# Altium PCB CM5 Nas.PcbDoc (part 2 of 4)
Units mm, origin at the board's own origin, x right, y up, seen from the top; angles counter-clockwise.
Board outline 152.4 x 101.6 mm, 20 copper layers (F.Cu, F.Mask, B.Cu, B.Mask, In1.Cu, F.SilkS, In2.Cu, B.SilkS, F.Adhes, B.Adhes, F.Paste, B.Paste, Dwgs.User, Cmts.User, Eco1.User, Eco2.User, Edge.Cuts, Margin, B.CrtYd, F.CrtYd); 373 components, 619 nets, 1990 pads, 0 vias.
Unrouted connection lines stored in the file: 1086.
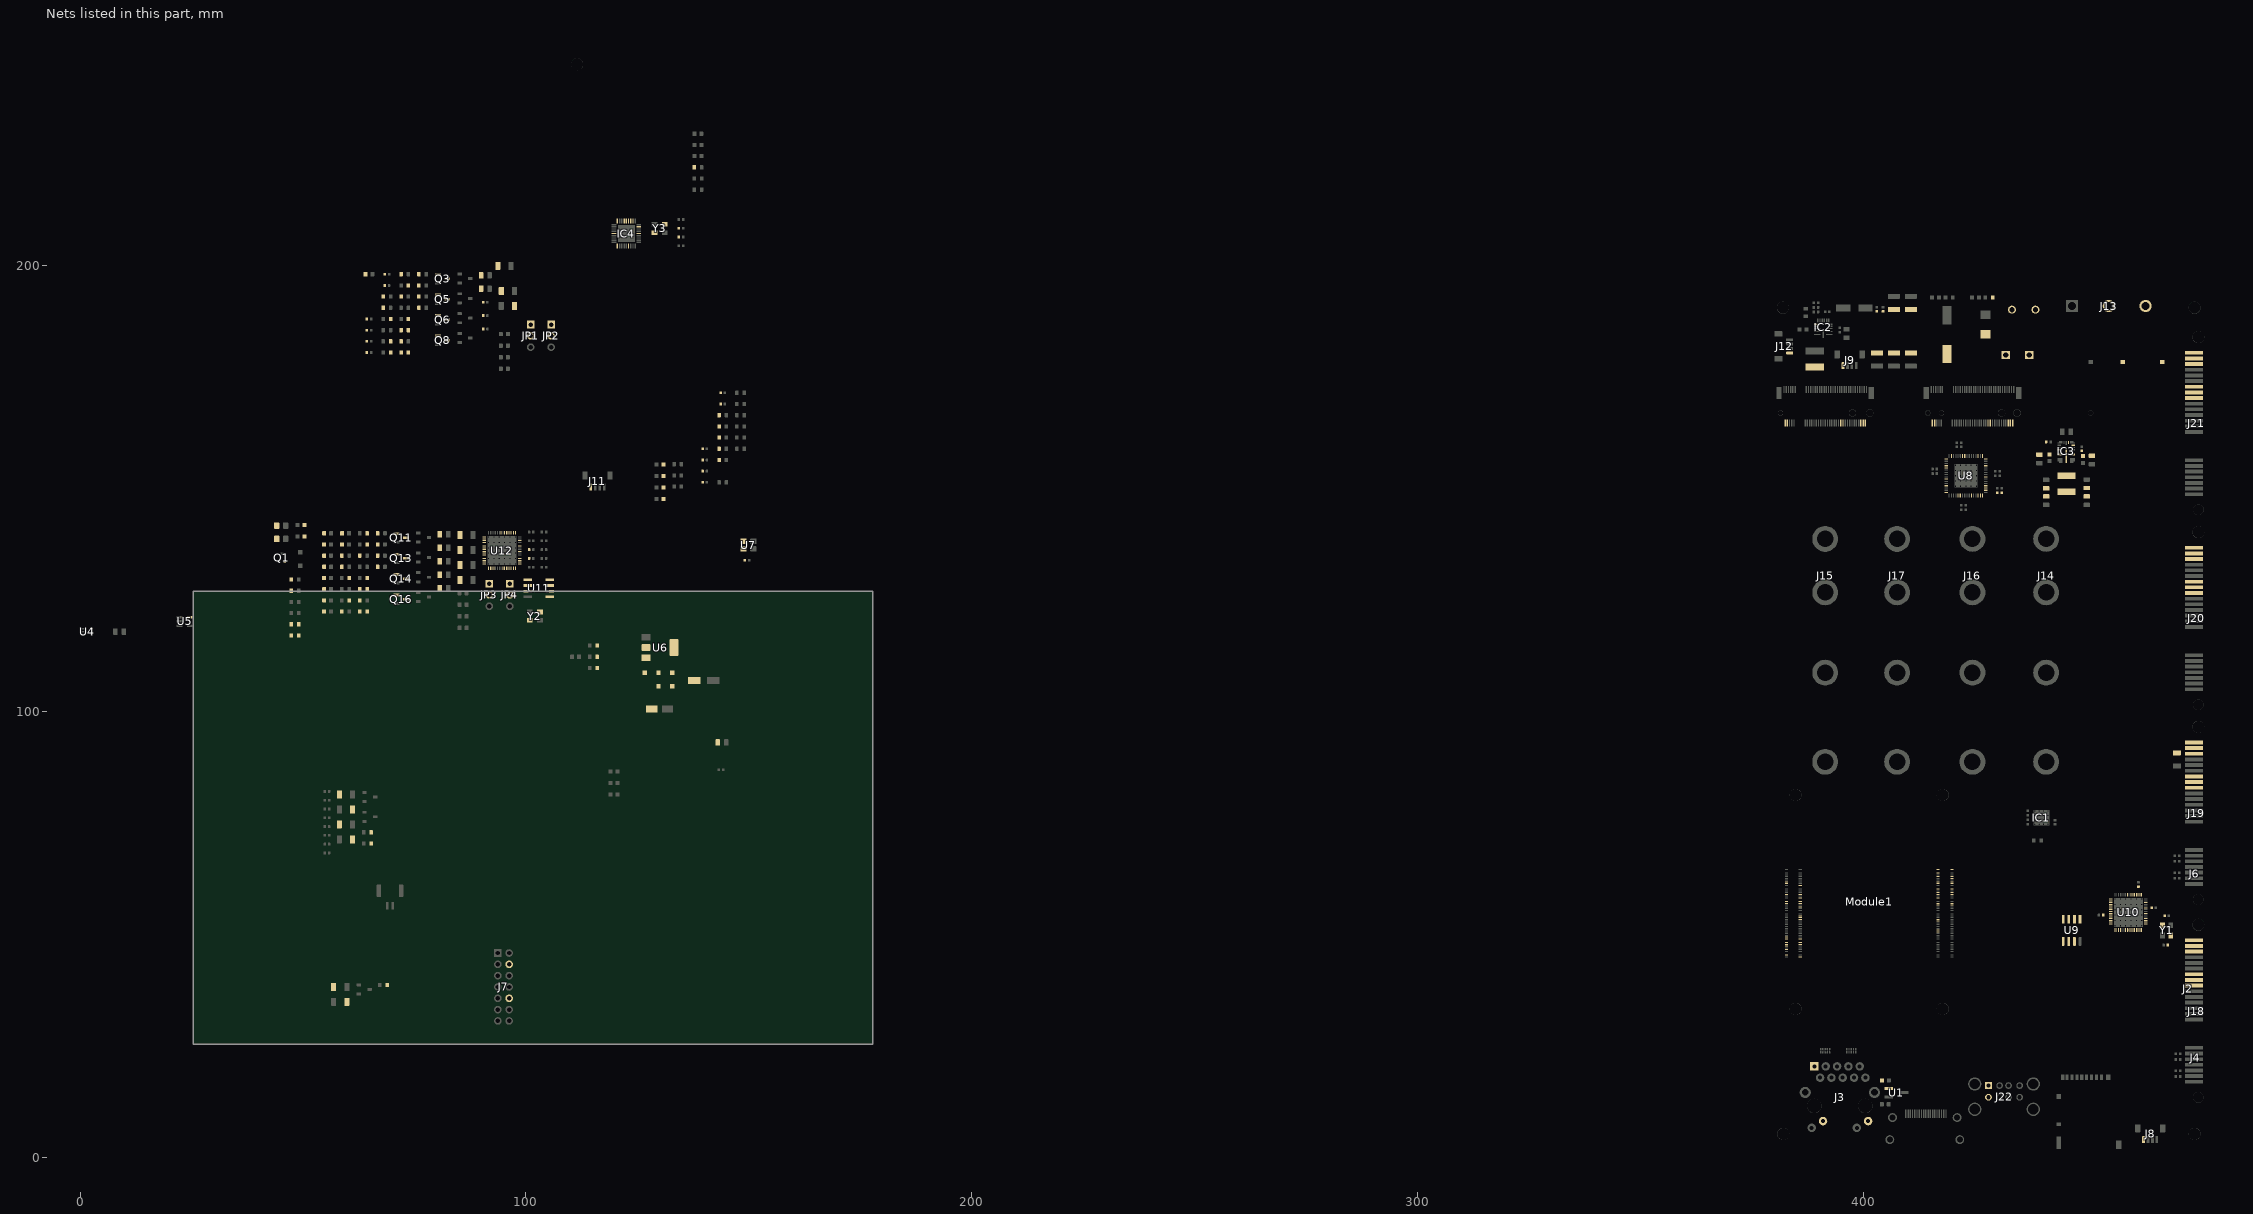
[diagram p12: the nets of this part, all layers, seen from the top]

## Footprints (in the part's own frame and the unit in brackets; to place one, negate y for a bottom-side part, rotate by r counter-clockwise, add the part's x,y. Pads: shape width x height; smd on the part's side, far side on the other; paste and mask are expansions set on the pad) (continued)
PinHeader_2x07_P2.54mm_Vertical [mm]
  rect 1.7x1.7 hole 1 paste-2539.97 mask-1.7: 1(0,0)
  round 1.7 hole 1 paste-2539.97 mask-1.7: 2(2.54,0) 3(0,-2.54) 4(2.54,-2.54) 5(0,-5.08) 6(2.54,-5.08) 7(0,-7.62) 8(2.54,-7.62) 9(0,-10.16) 10(2.54,-10.16) 11(0,-12.7) 12(2.54,-12.7) 13(0,-15.24) 14(2.54,-15.24)
  F.SilkS lines w0.254: -1.38,0 -1.38,1.38 0,1.38 ; -1.38,-16.62 3.92,-16.62 3.92,1.38 1.27,1.38 1.27,-1.27 -1.38,-1.27 -1.38,-16.62
  F.CrtYd lines w0.254: -1.77,-17.02 4.32,-17.02 4.32,1.78 -1.77,1.78 -1.77,-17.02
QFN50P600X600X100-37N-D [mm]
  rect 1.1x0.3 smd paste-1.1 mask-1.1: 1(-2.8,2) 2(-2.8,1.5) 3(-2.8,1) 4(-2.8,0.5) 5(-2.8,0) 6(-2.8,-0.5) 7(-2.8,-1) 8(-2.8,-1.5) 9(-2.8,-2) 19(2.8,-2) 20(2.8,-1.5) 21(2.8,-1) 22(2.8,-0.5) 23(2.8,0) 24(2.8,0.5) 25(2.8,1) 26(2.8,1.5) 27(2.8,2)
  rect 0.3x1.1 smd paste-1.1 mask-1.1: 10(-2,-2.8) 11(-1.5,-2.8) 12(-1,-2.8) 13(-0.5,-2.8) 14(0,-2.8) 15(0.5,-2.8) 16(1,-2.8) 17(1.5,-2.8) 18(2,-2.8) 28(2,2.8) 29(1.5,2.8) 30(1,2.8) 31(0.5,2.8) 32(0,2.8) 33(-0.5,2.8) 34(-1,2.8) 35(-1.5,2.8) 36(-2,2.8)
  rect 3.8x3.8 smd paste-3.8 mask-3.8: 37(0,0)
  F.SilkS circle w0.254: c-3.35,2.75 r0.125
  F.CrtYd lines w0.254: -3.6,-3.6 3.6,-3.6 3.6,3.6 -3.6,3.6 -3.6,-3.6
QFN-64-1EP_8x8mm_P0.4mm_EP6.5x6.5mm_ThermalVias [mm]
  rrect25% 0.8x0.2 smd paste-0.8 mask-0.8: 1(-3.95,3) 2(-3.95,2.6) 3(-3.95,2.2) 4(-3.95,1.8) 5(-3.95,1.4) 6(-3.95,1) 7(-3.95,0.6) 8(-3.95,0.2) 9(-3.95,-0.2) 10(-3.95,-0.6) 11(-3.95,-1) 12(-3.95,-1.4) 13(-3.95,-1.8) 14(-3.95,-2.2) 15(-3.95,-2.6) 16(-3.95,-3) 33(3.95,-3) 34(3.95,-2.6) 35(3.95,-2.2) 36(3.95,-1.8) 37(3.95,-1.4) 38(3.95,-1) 39(3.95,-0.6) 40(3.95,-0.2) 41(3.95,0.2) 42(3.95,0.6) 43(3.95,1) 44(3.95,1.4) 45(3.95,1.8) 46(3.95,2.2) 47(3.95,2.6) 48(3.95,3)
  rrect25% 0.2x0.8 smd paste-0.8 mask-0.8: 17(-3,-3.95) 18(-2.6,-3.95) 19(-2.2,-3.95) 20(-1.8,-3.95) 21(-1.4,-3.95) 22(-1,-3.95) 23(-0.6,-3.95) 24(-0.2,-3.95) 25(0.2,-3.95) 26(0.6,-3.95) 27(1,-3.95) 28(1.4,-3.95) 29(1.8,-3.95) 30(2.2,-3.95) 31(2.6,-3.95) 32(3,-3.95) 49(3,3.95) 50(2.6,3.95) 51(2.2,3.95) 52(1.8,3.95) 53(1.4,3.95) 54(1,3.95) 55(0.6,3.95) 56(0.2,3.95) 57(-0.2,3.95) 58(-0.6,3.95) 59(-1,3.95) 60(-1.4,3.95) 61(-1.8,3.95) 62(-2.2,3.95) 63(-2.6,3.95) 64(-3,3.95)
  round 0.5 hole 0.2 paste-2539.97 mask-0.5: 65(-3,-3) 65(-3,-1.8) 65(-3,-0.6) 65(-3,0.6) 65(-3,1.8) 65(-3,3) 65(-1.8,-3) 65(-1.8,-1.8) 65(-1.8,-0.6) 65(-1.8,0.6) 65(-1.8,1.8) 65(-1.8,3) 65(-0.6,-3) 65(-0.6,-1.8) 65(-0.6,-0.6) 65(-0.6,0.6) 65(-0.6,1.8) 65(-0.6,3) 65(0.6,-3) 65(0.6,-1.8) 65(0.6,-0.6) 65(0.6,0.6) 65(0.6,1.8) 65(0.6,3) 65(1.8,-3) 65(1.8,-1.8) 65(1.8,-0.6) 65(1.8,0.6) 65(1.8,1.8) 65(1.8,3) 65(3,-3) 65(3,-1.8) 65(3,-0.6) 65(3,0.6) 65(3,1.8) 65(3,3)
  rect 6.5x6.5 smd paste-6.5 mask-6.5: 65(0,0)
  rect 6.5x6.5 on Mid2 paste-6.5 mask-6.5: 65(0,0)
  rrect25% 1.01x1.01 on Mid13 paste-1.01 mask-1.01: Un1(-2.6,2.6) Un2(-2.6,1.3) Un3(-2.6,0) Un4(-2.6,-1.3) Un5(-2.6,-2.6) Un6(-1.3,2.6) Un7(-1.3,1.3) Un8(-1.3,0) Un9(-1.3,-1.3) Un10(-1.3,-2.6) Un11(0,2.6) Un12(0,1.3) Un13(0,0) Un14(0,-1.3) Un15(0,-2.6) Un16(1.3,2.6) Un17(1.3,1.3) Un18(1.3,0) Un19(1.3,-1.3) Un20(1.3,-2.6) Un21(2.6,2.6) Un22(2.6,1.3) Un23(2.6,0) Un24(2.6,-1.3) Un25(2.6,-2.6)
  F.SilkS region: -4.11,4.11 -4.35,4.44 -3.87,4.44
  F.SilkS lines w0.254: -4.11,-3.36 -4.11,-4.11 -3.36,-4.11 ; -4.11,3.36 -4.11,3.87 ; -3.81,4.11 -3.36,4.11 ; 3.36,-4.11 4.11,-4.11 4.11,-3.36 ; 3.36,4.11 4.11,4.11 4.11,3.36
  F.CrtYd lines w0.254: -4.6,-3.35 -4.6,3.35 -4.25,3.35 -4.25,4.25 -3.35,4.25 -3.35,4.6 3.35,4.6 3.35,4.25 4.25,4.25 4.25,3.35 4.6,3.35 4.6,-3.35 4.25,-3.35 4.25,-4.25 3.35,-4.25 3.35,-4.6 -3.35,-4.6 -3.35,-4.25 -4.25,-4.25 -4.25,-3.35 -4.6,-3.35
QFN-64-1EP_9x9mm_P0.5mm_EP5.2x5.2mm_ThermalVias [mm]
  rrect25% 0.825x0.25 smd paste-0.825 mask-0.825: 1(-4.437,3.75) 2(-4.437,3.25) 3(-4.437,2.75) 4(-4.437,2.25) 5(-4.437,1.75) 6(-4.437,1.25) 7(-4.437,0.75) 8(-4.437,0.25) 9(-4.437,-0.25) 10(-4.437,-0.75) 11(-4.437,-1.25) 12(-4.437,-1.75) 13(-4.437,-2.25) 14(-4.437,-2.75) 15(-4.437,-3.25) 16(-4.437,-3.75) 33(4.437,-3.75) 34(4.437,-3.25) 35(4.437,-2.75) 36(4.437,-2.25) 37(4.437,-1.75) 38(4.437,-1.25) 39(4.437,-0.75) 40(4.437,-0.25) 41(4.437,0.25) 42(4.437,0.75) 43(4.437,1.25) 44(4.437,1.75) 45(4.437,2.25) 46(4.437,2.75) 47(4.437,3.25) 48(4.437,3.75)
  rrect25% 0.25x0.825 smd paste-0.825 mask-0.825: 17(-3.75,-4.437) 18(-3.25,-4.437) 19(-2.75,-4.437) 20(-2.25,-4.437) 21(-1.75,-4.437) 22(-1.25,-4.437) 23(-0.75,-4.437) 24(-0.25,-4.437) 25(0.25,-4.437) 26(0.75,-4.437) 27(1.25,-4.437) 28(1.75,-4.437) 29(2.25,-4.437) 30(2.75,-4.437) 31(3.25,-4.437) 32(3.75,-4.437) 49(3.75,4.437) 50(3.25,4.437) 51(2.75,4.437) 52(2.25,4.437) 53(1.75,4.437) 54(1.25,4.437) 55(0.75,4.437) 56(0.25,4.437) 57(-0.25,4.437) 58(-0.75,4.437) 59(-1.25,4.437) 60(-1.75,4.437) 61(-2.25,4.437) 62(-2.75,4.437) 63(-3.25,4.437) 64(-3.75,4.437)
  round 0.5 hole 0.2 paste-2539.97 mask-0.5: 65(-2.35,1.175) 65(-2.35,2.35) 65(-2.35,0) 65(-2.35,-2.35) 65(-2.35,-1.175) 65(-1.175,2.35) 65(-1.175,1.175) 65(-1.175,0) 65(-1.175,-1.175) 65(-1.175,-2.35) 65(0,2.35) 65(0,1.175) 65(0,0) 65(0,-1.175) 65(0,-2.35) 65(1.175,2.35) 65(1.175,1.175) 65(1.175,0) 65(1.175,-1.175) 65(1.175,-2.35) 65(2.35,1.175) 65(2.35,2.35) 65(2.35,0) 65(2.35,-2.35) 65(2.35,-1.175)
  rect 5.2x5.2 smd paste-5.2 mask-5.2: 65(0,0)
  rect 5.2x5.2 on Mid2 paste-5.2 mask-5.2: 65(0,0)
  rrect25% 1.01x1.01 on Mid13 paste-1.01 mask-1.01: Un1(-1.95,1.95) Un2(-1.95,0.65) Un3(-1.95,-0.65) Un4(-1.95,-1.95) Un5(-0.65,1.95) Un6(-0.65,0.65) Un7(-0.65,-0.65) Un8(-0.65,-1.95) Un9(0.65,1.95) Un10(0.65,0.65) Un11(0.65,-0.65) Un12(0.65,-1.95) Un13(1.95,1.95) Un14(1.95,0.65) Un15(1.95,-0.65) Un16(1.95,-1.95)
  F.SilkS region: -4.61,4.61 -4.85,4.94 -4.37,4.94
  F.SilkS lines w0.254: 4.135,-4.61 4.61,-4.61 4.61,-4.135 ; -4.135,-4.61 -4.61,-4.61 -4.61,-4.135 ; 4.61,4.135 4.61,4.61 4.135,4.61 ; -4.61,4.135 -4.61,4.37 ; -4.135,4.61 -4.31,4.61
  F.CrtYd lines w0.254: 4.13,-5.1 -4.13,-5.1 -4.13,-4.75 -4.75,-4.75 -4.75,-4.13 -5.1,-4.13 -5.1,4.13 -4.75,4.13 -4.75,4.75 -4.13,4.75 -4.13,5.1 4.13,5.1 4.13,4.75 4.75,4.75 4.75,4.13 5.1,4.13 5.1,-4.13 4.75,-4.13 4.75,-4.75 4.13,-4.75 4.13,-5.1
R_0402_1005Metric#1 [mm]
  rrect25% 0.54x0.64 on Mid2 paste-0.64 mask-0.64: 1(-0.51,0) 2(0.51,0)
  B.SilkS lines w0.254: -0.154,0.38 0.154,0.38 ; -0.154,-0.38 0.154,-0.38
  B.CrtYd lines w0.254: -0.93,0.47 -0.93,-0.47 0.93,-0.47 0.93,0.47 -0.93,0.47
R_0402_1005Metric#2 [mm]
  rrect25% 0.54x0.64 smd paste-0.64 mask-0.64: 1(-0.51,0) 2(0.51,0)
  F.SilkS lines w0.254: 0.154,0.38 -0.154,0.38 ; 0.154,-0.38 -0.154,-0.38
  F.CrtYd lines w0.254: 0.93,0.47 -0.93,0.47 -0.93,-0.47 0.93,-0.47 0.93,0.47
R_0603_1608Metric#1 [mm]
  rrect25% 0.8x0.95 smd paste-0.95 mask-0.95: 1(-0.825,0) 2(0.825,0)
  F.SilkS lines w0.254: -0.237,-0.523 0.237,-0.523 ; -0.237,0.523 0.237,0.523
  F.CrtYd lines w0.254: -1.48,-0.73 1.48,-0.73 1.48,0.73 -1.48,0.73 -1.48,-0.73
R_0603_1608Metric#2 [mm]
  rrect25% 0.8x0.95 on Mid2 paste-0.95 mask-0.95: 1(-0.825,0) 2(0.825,0)
  B.SilkS lines w0.254: -0.237,-0.523 0.237,-0.523 ; -0.237,0.523 0.237,0.523
  B.CrtYd lines w0.254: -1.48,-0.73 1.48,-0.73 1.48,0.73 -1.48,0.73 -1.48,-0.73
R_0805_2012Metric_Pad1.20x1.40mm_HandSolder [mm]
  rrect21% 1.2x1.4 smd paste-1.4 mask-1.4: 1(-1,0) 2(1,0)
  F.SilkS lines w0.254: -0.227,-0.735 0.227,-0.735 ; -0.227,0.735 0.227,0.735
  F.CrtYd lines w0.254: -1.85,-0.95 1.85,-0.95 1.85,0.95 -1.85,0.95 -1.85,-0.95
Raspberry-Pi-5-Compute-Module [mm]
  rect 0.7x0.2 smd paste-0.7 mask-0.7: 1(-2.04,31.3) 2(1.04,31.3) 3(-2.04,30.9) 4(1.04,30.9) 5(-2.04,30.5) 6(1.04,30.5) 7(-2.04,30.1) 8(1.04,30.1) 9(-2.04,29.7) 10(1.04,29.7) 11(-2.04,29.3) 12(1.04,29.3) 13(-2.04,28.9) 14(1.04,28.9) 15(-2.04,28.5) 16(1.04,28.5) 17(-2.04,28.1) 18(1.04,28.1) 19(-2.04,27.7) 20(1.04,27.7) 21(-2.04,27.3) 22(1.04,27.3) 23(-2.04,26.9) 24(1.04,26.9) 25(-2.04,26.5) 26(1.04,26.5) 27(-2.04,26.1) 28(1.04,26.1) 29(-2.04,25.7) 30(1.04,25.7) 31(-2.04,25.3) 32(1.04,25.3) 33(-2.04,24.9) 34(1.04,24.9) 35(-2.04,24.5) 36(1.04,24.5) 37(-2.04,24.1) 38(1.04,24.1) 39(-2.04,23.7) 40(1.04,23.7) 41(-2.04,23.3) 42(1.04,23.3) 43(-2.04,22.9) 44(1.04,22.9) 45(-2.04,22.5) 46(1.04,22.5) 47(-2.04,22.1) 48(1.04,22.1) 49(-2.04,21.7) 50(1.04,21.7) 51(-2.04,21.3) 52(1.04,21.3) 53(-2.04,20.9) 54(1.04,20.9) 55(-2.04,20.5) 56(1.04,20.5) 57(-2.04,20.1) 58(1.04,20.1) 59(-2.04,19.7) 60(1.04,19.7) 61(-2.04,19.3) 62(1.04,19.3) 63(-2.04,18.9) 64(1.04,18.9) 65(-2.04,18.5) 66(1.04,18.5) 67(-2.04,18.1) 68(1.04,18.1) 69(-2.04,17.7) 70(1.04,17.7) 71(-2.04,17.3) 72(1.04,17.3) 73(-2.04,16.9) 74(1.04,16.9) 75(-2.04,16.5) 76(1.04,16.5) 77(-2.04,16.1) 78(1.04,16.1) 79(-2.04,15.7) 80(1.04,15.7) 81(-2.04,15.3) 82(1.04,15.3) 83(-2.04,14.9) 84(1.04,14.9) 85(-2.04,14.5) 86(1.04,14.5) 87(-2.04,14.1) 88(1.04,14.1) 89(-2.04,13.7) 90(1.04,13.7) 91(-2.04,13.3) 92(1.04,13.3) 93(-2.04,12.9) 94(1.04,12.9) 95(-2.04,12.5) 96(1.04,12.5) 97(-2.04,12.1) 98(1.04,12.1) 99(-2.04,11.7) 100(1.04,11.7) 101(31.96,31.3) 102(35.04,31.3) 103(31.96,30.9) 104(35.04,30.9) 105(31.96,30.5) 106(35.04,30.5) 107(31.96,30.1) 108(35.04,30.1) 109(31.96,29.7) 110(35.04,29.7) 111(31.96,29.3) 112(35.04,29.3) 113(31.96,28.9) 114(35.04,28.9) 115(31.96,28.5) 116(35.04,28.5) 117(31.96,28.1) 118(35.04,28.1) 119(31.96,27.7) 120(35.04,27.7) 121(31.96,27.3) 122(35.04,27.3) 123(31.96,26.9) 124(35.04,26.9) 125(31.96,26.5) 126(35.04,26.5) 127(31.96,26.1) 128(35.04,26.1) 129(31.96,25.7) 130(35.04,25.7) 131(31.96,25.3) 132(35.04,25.3) 133(31.96,24.9) 134(35.04,24.9) 135(31.96,24.5) 136(35.04,24.5) 137(31.96,24.1) 138(35.04,24.1) 139(31.96,23.7) 140(35.04,23.7) 141(31.96,23.3) 142(35.04,23.3) 143(31.96,22.9) 144(35.04,22.9) 145(31.96,22.5) 146(35.04,22.5) 147(31.96,22.1) 148(35.04,22.1) 149(31.96,21.7) 150(35.04,21.7) 151(31.96,21.3) 152(35.04,21.3) 153(31.96,20.9) 154(35.04,20.9) 155(31.96,20.5) 156(35.04,20.5) 157(31.96,20.1) 158(35.04,20.1) 159(31.96,19.7) 160(35.04,19.7) 161(31.96,19.3) 162(35.04,19.3) 163(31.96,18.9) 164(35.04,18.9) 165(31.96,18.5) 166(35.04,18.5) 167(31.96,18.1) 168(35.04,18.1) 169(31.96,17.7) 170(35.04,17.7) 171(31.96,17.3) 172(35.04,17.3) 173(31.96,16.9) 174(35.04,16.9) 175(31.96,16.5) 176(35.04,16.5) 177(31.96,16.1) 178(35.04,16.1) 179(31.96,15.7) 180(35.04,15.7) 181(31.96,15.3) 182(35.04,15.3) 183(31.96,14.9) 184(35.04,14.9) 185(31.96,14.5) 186(35.04,14.5) 187(31.96,14.1) 188(35.04,14.1) 189(31.96,13.7) 190(35.04,13.7) 191(31.96,13.3) 192(35.04,13.3) 193(31.96,12.9) 194(35.04,12.9) 195(31.96,12.5) 196(35.04,12.5) 197(31.96,12.1) 198(35.04,12.1) 199(31.96,11.7) 200(35.04,11.7)
  round 2.7 hole 2.7 paste-2539.97 mask-2.7: Un1(0,48) Un2(0,0) Un3(33,48) Un4(33,0)
  F.SilkS lines w0.254: -1.86,11.1 -1.86,10.1 0.94,10.1 0.94,11.1 ; -1.86,31.9 -1.86,32.9 0.94,32.9 0.94,31.9 ; 32.06,11.1 32.06,10.1 34.94,10.1 34.94,11.1 ; 32.06,31.9 32.06,32.9 34.94,32.9 34.94,31.9 ; -3.5,0 ccw(c0,0) 0,-3.5 33,-3.5 ccw(c33,0) 36.5,0 36.5,48 ccw(c33,48) 33,51.5 0,51.5 ccw(c0,48) -3.5,48 -3.5,0
  F.CrtYd lines w0.254: -2.31,10.1 1.39,10.1 1.39,32.9 -2.31,32.9 -2.31,10.1 ; 31.61,10.1 35.39,10.1 35.39,32.9 31.61,32.9 31.61,10.1
RGEF1200 [mm]
  rect 1.8x1.8 hole 1.2 paste-2539.97 mask-1.8: 1(0,0)
  round 1.8 hole 1.2 paste-2539.97 mask-1.8: 2(10.15,-1.4)
  F.SilkS lines w0.254: -1.325,0.75 -3.125,0.75 -3.125,-2.1 8.875,-2.15 ; 1.275,0.75 13.275,0.75 13.275,-2.15 11.275,-2.15 ; 0,1.4 ccw(c0,1.35) 0,1.3 ccw(c0,1.35) 0,1.4
  F.CrtYd lines w0.254: -4.125,1.9 -4.125,-3.3 14.275,-3.3 14.275,1.9 -4.125,1.9
RJ45_UDE_RB1-125B8G1A [mm]
  round 1.9 hole 0.9 paste-2539.97 mask-1.9: L1(12.04,-12.27) L2(9.5,-13.79) L3(1.93,-12.27) L4(-0.61,-13.79) R2(1.27,-2.54) R3(2.54,0) R4(3.81,-2.54) R5(5.08,0) R6(6.35,-2.54) R7(7.62,0) R8(8.89,-2.54) R9(10.16,0) R10(11.43,-2.54)
  rect 1.9x1.9 hole 0.9 paste-2539.97 mask-1.9: R1(0,0)
  round 2.5 hole 1.5 paste-2539.97 mask-2.5: SH(-2.06,-5.84) SH(13.49,-5.84)
  round 3.25 hole 3.25 paste-2539.97 mask-3.25: Un1(0,-8.89) Un2(11.43,-8.89)
  F.SilkS lines w0.254: -2.36,-7.58 -2.36,-19.98 13.79,-19.98 13.79,-7.58 ; -2.36,-4.08 -2.36,2.2 13.79,2.2 13.79,-4.08
  Dwgs.User lines w0.254: -2.16,-18.78 0.84,-15.78 ; -2.16,-17.78 -0.16,-15.78 ; -2.16,-16.78 -1.16,-15.78 ; -1.16,-19.78 2.84,-15.78 ; -0.6,-8.09 0.6,-6.89 ; -0.6,-7.09 0.6,-5.89 ; -0.6,-6.09 0.6,-4.89 ; -0.6,-5.09 0.6,-3.89 ; -0.6,-4.09 -0.2,-3.69 ; -0.16,-19.78 3.84,-15.78 ; 0.6,-7.89 -0.6,-9.09 ; 0.84,-19.77 6.33,-14.28 ; 1.84,-19.78 7.22,-14.4 ; 1.84,-15.78 -2.16,-19.78 ; 2.84,-19.77 7.22,-15.39 ; 3.84,-19.78 7.84,-15.78 ; 4.21,-15.41 5.34,-14.29 ; 4.84,-19.78 8.84,-15.78 ; 5.84,-19.78 9.84,-15.78 ; 6.84,-19.78 10.84,-15.78 ; 7.84,-19.78 11.84,-15.78 ; 8.84,-19.78 12.84,-15.78 ; 9.84,-19.78 13.59,-16.03 ; 10.83,-8.09 12.03,-6.89 ; 10.83,-7.09 12.03,-5.89 ; 10.83,-6.09 12.03,-4.89 ; 10.83,-5.09 12.03,-3.89 ; 10.83,-4.09 11.23,-3.69 ; 10.84,-19.77 13.59,-17.02 ; 11.84,-19.77 13.59,-18.02 ; 12.03,-7.89 10.83,-9.09 ; 12.84,-19.77 13.59,-19.02 ; -2.16,-19.78 13.59,-19.78 13.59,-15.78 7.22,-15.78 7.22,-14.28 4.21,-14.28 4.21,-15.78 -2.16,-15.78 -2.16,-19.78 ; -0.6,-9.09 -0.6,-3.69 0.6,-3.69 0.6,-9.09 -0.6,-9.09 ; 10.83,-9.09 10.83,-3.69 12.03,-3.69 12.03,-9.09 10.83,-9.09
  F.CrtYd lines w0.254: -3.81,-7.59 -3.81,-4.09 -2.66,-4.09 -2.66,2.5 14.09,2.5 14.09,-4.09 15.24,-4.09 15.24,-7.59 14.09,-7.59 14.09,-20.28 -2.66,-20.28 -2.66,-7.59 -3.81,-7.59
SMBJ5.0A [mil]
  rect 77x89 smd paste-89 mask-89: 1(-85.5,0) 2(85.5,0)
  F.SilkS lines w10: 95.5,-57.6 95.5,-83 -95.5,-83 -95.5,-57.6 ; 95.5,57.6 95.5,83 -95.5,83 -95.5,57.6
  F.CrtYd lines w10: 134,-88 134,88 -134,88 -134,-88 134,-88
SMBJ12A [mil]
  rect 77x89 on Mid2 paste-89 mask-89: 1(-85.5,0) 2(85.5,0)
  B.SilkS lines w10: 95.5,-57.6 95.5,-83 -95.5,-83 -95.5,-57.6 ; 95.5,57.6 95.5,83 -95.5,83 -95.5,57.6
  B.CrtYd lines w10: 134,-88 134,88 -134,88 -134,-88 134,-88
SOIC-8_3.9x4.9mm_P1.27mm [mm]
  rrect25% 1.95x0.6 smd paste-1.95 mask-1.95: 1(-2.475,1.905) 2(-2.475,0.635) 3(-2.475,-0.635) 4(-2.475,-1.905) 5(2.475,-1.905) 6(2.475,-0.635) 7(2.475,0.635) 8(2.475,1.905)
  F.SilkS region: -2.7,2.465 -2.94,2.795 -2.46,2.795
  F.SilkS lines w0.254: -1.95,2.56 0,2.56 1.95,2.56 ; -1.95,-2.56 0,-2.56 1.95,-2.56
  F.CrtYd lines w0.254: -2.2,2.7 2.2,2.7 2.2,2.46 3.7,2.46 3.7,-2.46 2.2,-2.46 2.2,-2.7 -2.2,-2.7 -2.2,-2.46 -3.7,-2.46 -3.7,2.46 -2.2,2.46 -2.2,2.7
SOT95P237X117-3N [mm]
  rect 1.3x0.6 smd paste-1.3 mask-1.3: 1(-1.05,0.95) 2(-1.05,-0.95) 3(1.05,0)
  F.SilkS lines w0.254: -1.7,1.5 -0.4,1.5 ; -0.05,-1.46 0.05,-1.46 0.05,1.46 -0.05,1.46 -0.05,-1.46
  F.CrtYd lines w0.254: -1.95,-1.77 1.95,-1.77 1.95,1.77 -1.95,1.77 -1.95,-1.77
SOT-23-5 [mm]
  rrect25% 1.325x0.6 smd paste-1.325 mask-1.325: 1(-1.138,0.95) 2(-1.138,0) 3(-1.138,-0.95) 4(1.138,-0.95) 5(1.138,0.95)
  F.SilkS region: -1.3,1.51 -1.54,1.84 -1.06,1.84
  F.SilkS lines w0.254: -0.8,-1.56 0,-1.56 0.8,-1.56 ; -0.8,1.56 0,1.56 0.8,1.56
  F.CrtYd lines w0.254: -2.05,-1.5 -2.05,1.5 -1.05,1.5 -1.05,1.7 1.05,1.7 1.05,1.5 2.05,1.5 2.05,-1.5 1.05,-1.5 1.05,-1.7 -1.05,-1.7 -1.05,-1.5 -2.05,-1.5
SOT-223-3_TabPin2 [mm]
  rrect25% 2x1.5 smd paste-2 mask-2: 1(-3.15,2.3) 2(-3.15,0) 3(-3.15,-2.3)
  rrect25% 2x3.8 smd paste-3.8 mask-3.8: 2(3.15,0)
  F.SilkS region: -3.13,3.31 -3.37,3.64 -2.89,3.64
  F.SilkS lines w0.254: -1.85,-3.41 1.91,-3.41 1.91,-2.15 ; -1.85,3.41 1.91,3.41 1.91,2.15
  F.CrtYd lines w0.254: -4.4,-3.6 4.4,-3.6 4.4,3.6 -4.4,3.6 -4.4,-3.6
SOT-353_SC-70-5 [mm]
  rrect25% 0.65x0.4 smd paste-0.65 mask-0.65: 1(-0.95,0.65) 2(-0.95,0) 3(-0.95,-0.65) 4(0.95,-0.65) 5(0.95,0.65)
  F.SilkS region: -1.08,1.11 -1.32,1.44 -0.84,1.44
  F.SilkS lines w0.254: -0.71,1.16 0.7,1.16 ; -0.7,-1.16 0.7,-1.16
  F.CrtYd lines w0.254: -1.6,-1.4 1.6,-1.4 1.6,1.4 -1.6,1.4 -1.6,-1.4
SPARKFUN_PRT-14417 [mm]
  rect 0.6x1.55 on Mid2 paste-1.55 mask-1.55: 1(-1.5,-2.45) 2(-0.5,-2.45) 3(0.5,-2.45) 4(1.5,-2.45)
  rect 1.2x1.8 on Mid2 paste-1.8 mask-1.8: S1(-2.8,1.425) S2(2.8,1.425)
  B.SilkS circle w0.254: c-1.5,-3.75 r0.1
  B.SilkS lines w0.254: 2.12,-2.125 3,-2.125 3,0.205 ; -2.12,-2.125 -3,-2.125 -3,0.205 ; 1.88,2.125 -1.88,2.125
  B.CrtYd lines w0.254: 3.65,-3.475 3.65,2.575 -3.65,2.575 -3.65,-3.475 3.65,-3.475
SRN5040TA1R0M [mm]
  rect 1.5x4.2 smd paste-4.2 mask-4.2: 1(-1.8,0) 2(1.8,0)
  F.SilkS lines w0.254: 1.5,-2.5 -2,-2.475 ; 1.5,2.5 -2,2.5
  F.CrtYd lines w0.254: 3.55,-3.5 3.55,3.5 -3.55,3.5 -3.55,-3.5 3.55,-3.5
SRN50402R2Y [mm]
  rect 1.5x4 smd paste-4 mask-4: 1(-1.8,0) 2(1.8,0)
  F.SilkS lines w0.254: 2.5,-2.5 -2.1,-2.5 ; 2.4,2.5 -2.1,2.5
  F.CrtYd lines w0.254: 3.55,-3.5 3.55,3.5 -3.55,3.5 -3.55,-3.5 3.55,-3.5
TestPoint_Pad_1.0x1.0mm [mm]
  rect 1x1 smd paste-1 mask-1: 1(0,0)
  F.SilkS lines w0.254: -0.7,-0.7 0.7,-0.7 0.7,0.7 -0.7,0.7 -0.7,-0.7
  F.CrtYd lines w0.254: -1,-1 1,-1 1,1 -1,1 -1,-1
TSOT-23_HandSoldering [mm]
  rrect25% 2x0.65 smd paste-2 mask-2: 1(-1.71,0.95) 2(-1.71,-0.95) 3(1.71,0)
  F.SilkS region: -1.28,1.55 -1.52,1.88 -1.04,1.88
  F.SilkS lines w0.254: -0.905,-1.56 0.945,-1.56 0.945,-0.67 ; -0.89,1.56 0.96,1.56 0.96,0.67
  F.CrtYd lines w0.254: -2.96,-1.7 2.96,-1.7 2.96,1.7 -2.96,1.7 -2.96,-1.7
USB_A_Wuerth_61400826021_Horizontal_Stacked [mm]
  rect 1.5x1.5 hole 0.92 paste-2539.97 mask-1.5: 1(0,0)
  round 1.5 hole 0.92 paste-2539.97 mask-1.5: 2(2.5,0) 3(4.5,0) 4(7,0) 5(0,-2.62) 6(2.5,-2.62) 7(4.5,-2.62) 8(7,-2.62)
  round 3 hole 2.3 paste-2539.97 mask-3: 9(-3.07,-5.33) 9(-3.07,0.35) 9(10.07,-5.33) 9(10.07,0.35)
  F.SilkS lines w0.254: -2.81,-7.08 -2.81,-15.05 -3.81,-15.05 -3.81,-15.67 10.81,-15.67 10.81,-15.05 9.81,-15.05 9.81,-7.08 ; -2.81,-3.58 -2.81,-1.4 ; -1.69,1.45 8.69,1.45 ; -0.4,1.6 0.4,1.6 ; 9.81,-3.58 9.81,-1.4
  F.CrtYd lines w0.254: -5.07,-6.17 -5.07,-4.49 -3.91,-3.33 -3.26,-3.33 -3.26,-1.74 -3.82,-1.74 -5.07,-0.49 -5.07,1.19 -3.91,2.35 -2.26,2.35 -1.8,1.89 8.8,1.89 9.26,2.35 10.91,2.35 12.07,1.19 12.07,-0.49 10.82,-1.74 10.26,-1.74 10.26,-3.33 10.91,-3.33 12.07,-4.49 12.07,-6.17 10.91,-7.33 10.26,-7.33 10.26,-14.61 11.25,-14.61 11.25,-16.11 -4.25,-16.11 -4.25,-14.61 -3.26,-14.61 -3.26,-7.33 -3.91,-7.33 -5.07,-6.17
USON-10_2.5x1.0mm_P0.5mm [mm]
  rrect25% 0.55x0.3 smd paste-0.55 mask-0.55: 1(-0.385,1) 2(-0.385,0.5) 3(-0.385,0) 4(-0.385,-0.5) 5(-0.385,-1) 6(0.385,-1) 7(0.385,-0.5) 8(0.385,0) 9(0.385,0.5) 10(0.385,1)
  F.SilkS region: -0.62,1.41 -0.9,1.41 -0.62,1.69
  F.SilkS lines w0.254: 0.5,-1.41 -0.5,-1.41 ; 0.5,1.41 -0.29,1.41
  F.CrtYd lines w0.254: 0.91,-1.5 0.91,1.5 -0.91,1.5 -0.91,-1.5 0.91,-1.5
VQFN-40-1EP_6x6mm_P0.5mm_EP3.5x3.5mm_ThermalVias [mm]
  rrect25% 0.85x0.25 on Mid2 paste-0.85 mask-0.85: 1(-2.95,-2.25) 2(-2.95,-1.75) 3(-2.95,-1.25) 4(-2.95,-0.75) 5(-2.95,-0.25) 6(-2.95,0.25) 7(-2.95,0.75) 8(-2.95,1.25) 9(-2.95,1.75) 10(-2.95,2.25) 21(2.95,2.25) 22(2.95,1.75) 23(2.95,1.25) 24(2.95,0.75) 25(2.95,0.25) 26(2.95,-0.25) 27(2.95,-0.75) 28(2.95,-1.25) 29(2.95,-1.75) 30(2.95,-2.25)
  rrect25% 0.25x0.85 on Mid2 paste-0.85 mask-0.85: 11(-2.25,2.95) 12(-1.75,2.95) 13(-1.25,2.95) 14(-0.75,2.95) 15(-0.25,2.95) 16(0.25,2.95) 17(0.75,2.95) 18(1.25,2.95) 19(1.75,2.95) 20(2.25,2.95) 31(2.25,-2.95) 32(1.75,-2.95) 33(1.25,-2.95) 34(0.75,-2.95) 35(0.25,-2.95) 36(-0.25,-2.95) 37(-0.75,-2.95) 38(-1.25,-2.95) 39(-1.75,-2.95) 40(-2.25,-2.95)
  round 0.5 hole 0.2 paste-2539.97 mask-0.5: 41(-1.5,1.5) 41(-1.5,-0.5) 41(-1.5,0.5) 41(-1.5,-1.5) 41(-0.5,1.5) 41(-0.5,-0.5) 41(-0.5,0.5) 41(-0.5,-1.5) 41(0.5,1.5) 41(0.5,-0.5) 41(0.5,0.5) 41(0.5,-1.5) 41(1.5,1.5) 41(1.5,-0.5) 41(1.5,0.5) 41(1.5,-1.5)
  rect 3.5x3.5 smd paste-3.5 mask-3.5: 41(0,0)
  rect 3.5x3.5 on Mid2 paste-3.5 mask-3.5: 41(0,0)
  rrect25% 0.94x0.94 on Mid15 paste-0.94 mask-0.94: Un1(-1.17,1.17) Un2(-1.17,0) Un3(-1.17,-1.17) Un4(0,1.17) Un5(0,0) Un6(0,-1.17) Un7(1.17,1.17) Un8(1.17,0) Un9(1.17,-1.17)
  B.SilkS region: -2.87,-3.44 -3.35,-3.44 -3.11,-3.11
  B.SilkS lines w0.254: -2.635,3.11 -3.11,3.11 -3.11,2.635 ; 2.635,3.11 3.11,3.11 3.11,2.635 ; -3.11,-2.635 -3.11,-2.87 ; 3.11,-2.635 3.11,-3.11 2.635,-3.11 ; -2.81,-3.11 -2.635,-3.11
  B.CrtYd lines w0.254: -2.63,3.63 -2.63,3.25 -3.25,3.25 -3.25,2.63 -3.63,2.63 -3.63,-2.63 -3.25,-2.63 -3.25,-3.25 -2.63,-3.25 -2.63,-3.63 2.63,-3.63 2.63,-3.25 3.25,-3.25 3.25,-2.63 3.63,-2.63 3.63,2.63 3.25,2.63 3.25,3.25 2.63,3.25 2.63,3.63 -2.63,3.63

## Part data
+5V1 +12V1 GND1 TP1 TP2 TP3 TP4 TP5 TP6 TP7: library part TestPoint_Pad_1.0x1.0mm, "SMD rectangular pad as test Point, square 1.0mm side length", ki_fp_filters="Pin* Test*"
  +5V1 +12V1 GND1 TP3 TP4 TP5 TP6 TP7: Description="test point"
  TP1 TP2: Field4=nf, Field5=nf, Field6=nf, Field7=nf, Part Description="Test point"
BT1: library part BatteryHolder_Keystone_3034_1x20mm, "Keystone 3034 SMD battery holder for 2020, 2025 and 2032 coincell batteries. http://www.keyelco.com/product-pdf.cfm?p=798", Datasheet=https://www.keyelco.com/userAssets/file/M65p9.pdf, Field4=Digikey, Field5=36-3034-ND, Field6=3034, Field7=Keystone, Part Description="Battery Retainer Coin, 20.0mm 1 Cell SMD (SMT) Tab"
C1 C2 C23 C29 C42 C54 C78 C80 C107 C135 C137 C138 C139 C140 C145 C146 C149 C150 C152 C154 C157 C158: library part C_0603_1608Metric, "Capacitor SMD 0603 (1608 Metric), square (rectangular) end terminal, IPC-7351 nominal, (Body size source: IPC-SM-782 page 76, https://www.pcb-3d.com/wordpress/wp-content/uploads/ipc-sm-782a_amendment_1_and_2.pdf), generated with kicad-footprint-generator", ki_fp_filters=C_*
  C1 C2: Datasheet=https://search.murata.co.jp/Ceramy/image/img/A01X/G101/ENG/GRM155R71C104KA88-01.pdf, Field4=Farnell, Field5=2611911, Field6="RM EMK105 B7104KV-F", Field7="TAIYO YUDEN EUROPE GMBH", Part Description="0.1uF 10% 16V Ceramic Capacitor X7R 0402 (1005 Metric)", Field8=110091611
  C23 C29 C42 C54 C78 C80 C107 C135 C137 C138 C139 C140 C145 C146 C149 C150 C152 C154 C157 C158: Description="Unpolarized capacitor, small symbol"
C3 C20 C21 C27 C28 C45 C48 C77 C81 C90 C91 C92 C93 C94 C99 C104 C128 C133 C147 C148 C151: library part C_0805_2012Metric, "Capacitor SMD 0805 (2012 Metric), square (rectangular) end terminal, IPC-7351 nominal, (Body size source: IPC-SM-782 page 76, https://www.pcb-3d.com/wordpress/wp-content/uploads/ipc-sm-782a_amendment_1_and_2.pdf, https://docs.google.com/spreadsheets/d/1BsfQQcO9C6DZCsRaXUlFlo91Tg2WpOkGARC1WS5S8t0/edit?usp=sharing), generated with kicad-footprint-generator", ki_fp_filters=C_*
  C3: Datasheet=https://search.murata.co.jp/Ceramy/image/img/A01X/G101/ENG/GRM21BR71A106KA73-01.pdf, Field5=490-14381-1-ND, Field4=Digikey, Field6=GRM21BR71A106KA73L, Field7=Murata, Part Description="10uF 10% 10V Ceramic Capacitor X7R 0805 (2012 Metric)", Field8=111893011
  C20 C21 C27 C28 C45 C48 C77 C81 C90 C91 C92 C93 C94 C99 C104 C128 C133 C147 C148 C151: Description="Unpolarized capacitor, small symbol"
C4 C6 C7 C8 C9 C12 C14 C15 C16 C17: library part C_1210_3225Metric, "Capacitor SMD 1210 (3225 Metric), square (rectangular) end terminal, IPC-7351 nominal, (Body size source: IPC-SM-782 page 76, https://www.pcb-3d.com/wordpress/wp-content/uploads/ipc-sm-782a_amendment_1_and_2.pdf), generated with kicad-footprint-generator", Description="Unpolarized capacitor", ki_fp_filters=C_*
C5 C13: library part EEE0JA152UAP, "SMD_Lytic_G", Description="Polarized capacitor", ki_fp_filters=CP_*
C10 C11 C18 C19 C22 C26 C30 C31 C33 C35 C36 C38 C39 C40 C41 C44 C46 C47 C49 C50 C51 C52 C53 C55 C56 C57 C58 C59 C60 C61 C62 C63 C64 C65 C66 C67 C68 C69 C70 C71 C72 C73 C74 C75 C76 C79 C82 C83 C84 C85 C86 C87 C88 C89 C95 C96 C100 C101 C102 C103 C108 C109 C110 C111 C112 C113 C114 C115 C116 C117 C118 C119 C119 C120 C120 C121 C122 C123 C123 C124 C124 C125 C129 C129 C130 C130 C131 C131 C132 C132 C141 C142 C143 C144 C153 C155 C156 C159 R29: library part C_0402_1005Metric, "Capacitor SMD 0402 (1005 Metric), square (rectangular) end terminal, IPC-7351 nominal, (Body size source: IPC-SM-782 page 76, https://www.pcb-3d.com/wordpress/wp-content/uploads/ipc-sm-782a_amendment_1_and_2.pdf), generated with kicad-footprint-generator"
  C10 C11 C18 C19: Description="Unpolarized capacitor", ki_fp_filters=C_*
  C22 C26 C30 C31 C33 C35 C36 C38 C39 C40 C41 C44 C46 C47 C49 C50 C51 C52 C53 C55 C79 C95 C96 C100 C101 C102 C103 C108 C109 C110 C111 C112 C113 C114 C115 C116 C117 C118 C119 C119 C120 C120 C121 C122 C123 C123 C124 C124 C125 C129 C129 C130 C130 C131 C131 C132 C132 C141 C142 C143 C144 C153 C155 C156 C159: Description="Unpolarized capacitor, small symbol", ki_fp_filters=C_*
  C56 C57 C58 C59 C60 C61 C62 C63 C65 C66 C67 C68 C69 C70 C71 C72 C73 C74 C75 C76 C82 C83 C84 C85 C86 C87 C88 C89: ki_fp_filters=C_*
  C64: Datasheet=https://search.murata.co.jp/Ceramy/image/img/A01X/G101/ENG/GRM155R71C104KA88-01.pdf, Field4=Farnell, Field5=2611911, Field6="RM EMK105 B7104KV-F", Field7="TAIYO YUDEN EUROPE GMBH", Field8=110091611, Part Description="0.1uF 10% 16V Ceramic Capacitor X7R 0402 (1005 Metric)", ki_fp_filters=C_*
  R29: Description="Resistor, small symbol", ki_fp_filters=R_*
C24: library part CAP_EEEFK1H100UR, Description="Polarized capacitor, small symbol", ki_fp_filters=CP_*
C25 C32 C34 C37: library part CAP_EEEFK1A220AR, Description="Polarized capacitor, small symbol", ki_fp_filters=CP_*
C43: library part CAP_EEEFTH101XAP, Description="Polarized capacitor, small symbol", ki_fp_filters=CP_*
C96 C97 C98 C98 C105 C106 C125 C126 C126 C127 C134 C134 C135 C136: library part C_1206_3216Metric, "Capacitor SMD 1206 (3216 Metric), square (rectangular) end terminal, IPC-7351 nominal, (Body size source: IPC-SM-782 page 76, https://www.pcb-3d.com/wordpress/wp-content/uploads/ipc-sm-782a_amendment_1_and_2.pdf), generated with kicad-footprint-generator", Description="Unpolarized capacitor, small symbol", ki_fp_filters=C_*
D1 D2 D3 D6 D7 D8 D9 D10 D11 D12 D13 D14 D15 D16 D17 D18 D19 D20 D21: library part LED_0603_1608Metric, "LED SMD 0603 (1608 Metric), square (rectangular) end terminal, IPC-7351 nominal, (Body size source: http://www.tortai-tech.com/upload/download/2011102023233369053.pdf), generated with kicad-footprint-generator", Field4=Digikey, Field7=Rohm, ki_fp_filters="LED* LED_SMD:* LED_THT:*"
  D1 D3 D6 D7 D8 D9 D10 D11 D12 D13 D14 D15 D16 D17 D18 D19 D20 D21: Datasheet=http://optoelectronics.liteon.com/upload/download/DS22-2000-226/LTST-S270KGKT.pdf, Field5=LTST-S270KGKT, Field6=SML-A12M8TT86N, Field8=650263301, Part Description="Green 572nm LED Indication - Discrete 2.2V 2-SMD, No Lead"
  D2: Datasheet=http://optoelectronics.liteon.com/upload/download/DS22-2000-210/LTST-S270KRKT.pdf, Field5=LTST-S270KRKT, Field6=SML-A12U8TT86Q, Field8=650295101, Part Description="Red 620nm LED Indication - Discrete 2.2V 2-SMD, No Lead"
D4: library part SMBJ12A, Description="Bidirectional transient-voltage-suppression diode", ki_fp_filters="TO-???* *_Diode_* *SingleDiode* D_*"
D5: library part SMBJ5.0A, Description="Bidirectional transient-voltage-suppression diode", ki_fp_filters="TO-???* *_Diode_* *SingleDiode* D_*"
F1 F2: library part RGEF1200, "RGEF1200-3", Description="Resettable fuse, polymeric positive temperature coefficient", ki_fp_filters="*polyfuse* *PTC*"
G***: library part F.SilkS_g8
H1 H2 H3 H4 H5: library part MountingHole_2.7mm_M2.5, "Mounting Hole 2.7mm, M2.5, no annular, generated by kicad-footprint-generator mountinghole.py", Field4=nf, Field5=nf, Field6=nf, Field7=nf, Part Description="M2.5 mounting hole", ki_fp_filters=MountingHole*
IC1: library part VQFN-40-1EP_6x6mm_P0.5mm_EP3.5x3.5mm_ThermalVias, "VQFN, 40 Pin (https://www.analog.com/media/en/package-pcb-resources/package/pkg_pdf/lfcspcp/cp-40/cp-40-29.pdf), generated with kicad-footprint-generator ipc_noLead_generator.py", Manufacturer_Name="Texas Instruments", Manufacturer_Part_Number=TPS65251-1RHAR, Mouser Part Number=595-TPS65251-1RHAR, Datasheet=http://www.ti.com/lit/gpn/TPS65251-1, Description="4.5-V to 18-V input, 3A/2A/2A output, Synchronous triple buck converter", Height=1, Mouser Price/Stock=https://www.mouser.co.uk/ProductDetail/Texas-Instruments/TPS65251-1RHAR?qs=JRStGrVgRuSy8em9PUe0zA%3D%3D, Arrow Part Number=TPS65251-1RHAR, Arrow Price/Stock=https://www.arrow.com/en/products/tps65251-1rhar/texas-instruments?region=nac
IC2: library part MAX20008AFOCVYT, "MAX20008AFOC/VY+T-1", Manufacturer_Name="Analog Devices", Manufacturer_Part_Number=MAX20008AFOC/VY+T, Mouser Part Number=700-MAX20008AFOC/VYT, Datasheet=https://componentsearchengine.com//MAX20008AFOC_VY+T.pdf, Description="Switching Voltage Regulators 36V, 220kHz to 2.2MHz, 4A/6A/8A Fully integrated step down converter", Height=0.75, Mouser Price/Stock=https://www.mouser.co.uk/ProductDetail/Analog-Devices-Maxim-Integrated/MAX20008AFOC-VY%2bT?qs=vLWxofP3U2wvQQR8GkDmgw%3D%3D, Arrow Part Number=MAX20008AFOC/VY+T, Arrow Price/Stock=https://www.arrow.com/en/products/max20008afocvyt/maxim-integrated?region=nac
IC3: library part LM62460QRPHRQ1, "RPH0016A_3.5x4.5x1", Manufacturer_Name="Texas Instruments", Manufacturer_Part_Number=LM61480Q3RPHRQ1, Mouser Part Number=595-LM61480Q3RPHRQ1, Datasheet=https://www.ti.com/product/LM62460-Q1?HQS=TI-null-null-octopart-df-pf-null-wwe, Description="Switching Voltage Regulators 8-A automotive buck converter optimized for power density and low EMI", Height=1, Mouser Price/Stock=https://www.mouser.co.uk/ProductDetail/Texas-Instruments/LM61480Q3RPHRQ1?qs=Wj%2FVkw3K%252BMDMY%2FXxTFEmEg%3D%3D, Arrow Part Number=LM61480Q3RPHRQ1, Arrow Price/Stock=https://www.arrow.com/en/products/lm61480q3rphrq1/texas-instruments?utm_currency=USD&region=nac
IC4: library part QFN50P600X600X100-37N-D, "36-PIN SQFN", Manufacturer_Name=Microchip, Manufacturer_Part_Number=USB2512B-AEZG, Mouser Part Number=886-USB2512B-AEZG, Datasheet=http://www.microchip.com/mymicrochip/filehandler.aspx?ddocname=en562310, Description="USB 2.0 Hub Controller 2-Port BC QFN36 Microchip USB2512B-AEZG, USB Controller, 480MBps, USB 2.0, 3.3 V, 36-Pin QFN", Height=1, Mouser Price/Stock=https://www.mouser.co.uk/ProductDetail/Microchip-Technology/USB2512B-AEZG?qs=pA5MXup5wxGNvJiLqKVEsA%3D%3D, Arrow Part Number=USB2512B-AEZG, Arrow Price/Stock=https://www.arrow.com/en/products/usb2512b-aezg/microchip-technology?region=nac
J1: library part AMPHENOL_10029449-111RLF, Datasheet=https://en.wikipedia.org/wiki/HDMI, Description="HDMI type A connector", ki_fp_filters=HDMI*A*
J2: library part Hirose_FH12-22S-0.5SH_1x22-1MP_P0.50mm_Horizontal, "Hirose FH12, FFC/FPC connector, FH12-22S-0.5SH, 22 Pins per row (https://www.hirose.com/product/en/products/FH12/FH12-24S-0.5SH(55)/), generated with kicad-footprint-generator", Datasheet=https://www.hirose.com/product/document?clcode=&productname=&series=FH12&documenttype=Catalog&lang=en&documentid=D31648_en, Field4=Mouser, Field5=798-FH12-22S-0.5SH55, Field6=FH12-22S-0.5SH55, Field7=Hirose, Part Description="22 Position FFC, FPC Connector Contacts, Bottom 0.020\" (0.50mm) Surface Mount, Right Angle", ki_fp_filters=Connector*:*_1x??_*
J3: library part RJ45_UDE_RB1-125B8G1A, "1 Port RJ45 Connector Through Hole 10/100/1000 Base-T, https://datasheet.lcsc.com/szlcsc/1901091107_UDE-Corp-RB1-125B8G1A_C363353.pdf#page=3", Datasheet=https://datasheet.lcsc.com/szlcsc/1901091107_UDE-Corp-RB1-125B8G1A_C363353.pdf, Description="LAN Transformer Jack, RJ45, 10/100/1000 BaseT", ki_fp_filters=RJ45*UDE*RB1*125B8G1A*
J4: library part JST_GH_SM07B-GHS-TB_1x07-1MP_P1.25mm_Horizontal, "JST GH series connector, SM07B-GHS-TB (http://www.jst-mfg.com/product/pdf/eng/eGH.pdf), generated with kicad-footprint-generator", Description="Generic connector, single row, 01x07, script generated", ki_fp_filters=Connector*:*_1x??_*
J5: library part DM3ATSFPEJM5, "DM3AT-SF-PEJM5-1", Datasheet=https://www.hirose.com/product/en/download_file/key_name/DM3/category/Catalog/doc_file_id/49662/?file_category_id=4&item_id=195&is_series=1, Field4=Farnell, Field5=2358234, Field6=503398-1892, Field7=Molex, Part Description="9 (8 + 1) Position Card Connector microSD™ Surface Mount, Right Angle Gold", Field8=UCON00512, ki_fp_filters=microSD*
J6: library part SPARKFUN_PRT-14417, Description="Generic connector, single row, 01x04, script generated", ki_fp_filters=Connector*:*_1x??_*
J7: library part PinHeader_2x07_P2.54mm_Vertical, "Through hole straight pin header, 2x07, 2.54mm pitch, double rows", Datasheet=https://www.toby.co.uk/uploads/publications/1673.pdf, Field4=Toby, Field5=THD-07-R, Field6=THD-07-R, Field7=Toby, Part Description=PinHeader_2x07_P2.54mm_Vertical, ki_fp_filters=Connector*:*_2x??_*
J8 J9 J11 J12: library part JST_SH_BM04B-SRSS-TB_1x04-1MP_P1.00mm_Vertical, "JST SH series connector, BM04B-SRSS-TB (http://www.jst-mfg.com/product/pdf/eng/eSH.pdf), generated with kicad-footprint-generator", Field5=SHBM04B-SRSS-TB, Field6=SHBM04B-SRSS-TB, Field7=JST, Part Description="4 pin vertical 1mm pitch connector", ki_fp_filters=Connector*:*_1x??_*
J10: library part JST_GH_BM02B-GHS-TBT_1x02-1MP_P1.25mm_Vertical, "JST GH series connector, BM02B-GHS-TBT (http://www.jst-mfg.com/product/pdf/eng/eGH.pdf), generated with kicad-footprint-generator", Description="Generic connector, single row, 01x02, script generated (kicad-library-utils/schlib/autogen/connector/)", ki_fp_filters=Connector*:*_1x??_*
J13: library part 4DBP10803, "4DB-P108-03-4", Manufacturer_Name="TE Connectivity", Manufacturer_Part_Number=4DB-P108-03, Mouser Part Number=571-214376675, Datasheet=https://www.mouser.co.il/datasheet/2/418/9/ENG_CD_2_1437667_4_N9-624224.pdfhttps://www.te.com/commerce/DocumentDelivery/DDEController?Action=srchrtrv&DocNm=1-1773458-2_BARRIER_STRIPS_QRG&DocType=Data%20Sheet&DocLang=English&PartCntxt=2-1437667-5&DocFormat, Description="Dual Barrier, Printed Circuit Pin, Wire-to-Board, 3 Position, 8.26 mm [.325 in] Centerline, 1 Row, Buchanan 4DB Series, Barrier Strips", Height=13.589, Mouser Price/Stock=https://www.mouser.co.uk/ProductDetail/TE-Connectivity/4DB-P108-03?qs=cX92MwKKzGt2YIn2dZcfJQ%3D%3D, Arrow Part Number=4DB-P108-03, Arrow Price/Stock=https://www.arrow.com/en/products/4db-p108-03/te-connectivity?utm_currency=USD&region=nac
J14 J15 J16 J17: library part 21991195, "2199119-5-4", Description="M.2 Socket 3 Mechanical Key M", Field5=MTSSD03-67MSW337, Field6=MTSSD03-67MSW337, Field7=MTCONN, Part Description="M.2 M Key connector", ki_fp_filters=*M*2*M*
J18 J19 J20 J21: library part 87713-1001, "87713-1001", Manufacturer_Name=Molex, Manufacturer_Part_Number=0877131001, Mouser Part Number=N/A, Datasheet=http://www.molex.com/pdm_docs/sd/877131001_sd.pdf, Description="CONN RCPT 22POS STR .05\" SMD AU", Mouser Price/Stock=https://www.mouser.co.uk/ProductDetail/Molex/0877131001?qs=PBcRNPEHKspplW%252BmhlTGqA%3D%3D, Arrow Part Number=0877131001, Arrow Price/Stock=https://www.arrow.com/en/products/0877131001/molex?region=nac
J22: library part USB_A_Wuerth_61400826021_Horizontal_Stacked, "Stacked USB A connector http://katalog.we-online.de/em/datasheet/61400826021.pdf", Description="USB Type A connector, stacked", ki_fp_filters=USB*
JP1 JP2 JP3 JP4: library part PinHeader_1x03_P2.54mm_Vertical, "Through hole straight pin header, 1x03, 2.54mm pitch, single row", Description="Jumper, 3-pole, pins 1+2 closed/bridged", ki_fp_filters="Jumper* TestPoint*3Pads* TestPoint*Bridge*"
L1 L2 L3: library part INDPM5050X400N, "SRN5040-4R7M", Description="Inductor, small symbol", ki_fp_filters="Choke_* *Coil* Inductor_* L_*"
L4: library part SRN5040TA1R0M, "SRN5040TA-1R0M-3", Description="Inductor, small symbol", ki_fp_filters="Choke_* *Coil* Inductor_* L_*"
L5: library part SRN50402R2Y, "SRN5040-2R2Y-1", Description=Inductor, ki_fp_filters="Choke_* *Coil* Inductor_* L_*"
Module1: library part Raspberry-Pi-5-Compute-Module, "Raspberry Pi 5 Compute Module", Description="RaspberryPi Compute module 5", Field4=Amphenol, Field5="2x 10164227-1001A1RLF", Field6="2x 10164227-1001A1RLF", Field7=Hirose, Part Description="100 Position Connector Receptacle, Center Strip Contacts Surface Mount Gold"
Q1: library part BSS84AKW115, "SOT323(H=1.1mm)", Datasheet=https://ngspice.sourceforge.io/docs/ngspice-html-manual/manual.xhtml#cha_MOSFETs, Description="P-MOSFET transistor, drain/source/gate", Sim.Device=PMOS, Sim.Type=VDMOS, Sim.Pins="1=D 2=G 3=S"
Q2 Q2 Q4 Q7 Q9 Q10 Q10 Q12 Q15 Q15 Q17: library part P200_SOT-23, "SOT, 3 Pin (https://www.jedec.org/system/files/docs/to-236h.pdf variant AB), generated with kicad-footprint-generator ipc_gullwing_generator.py", Datasheet=https://ngspice.sourceforge.io/docs/ngspice-html-manual/manual.xhtml#cha_BJTs, Description="Bipolar transistor symbol for simulation only, substrate tied to the emitter", Sim.Device=NPN, Sim.Type=GUMMELPOON, Sim.Pins="1=C 2=B 3=E"
Q3 Q5 Q6 Q8 Q11 Q13 Q14 Q16: library part SOT95P237X117-3N, "SOT23A", Datasheet=https://ngspice.sourceforge.io/docs/ngspice-html-manual/manual.xhtml#cha_MOSFETs, Description="P-MOSFET transistor, drain/source/gate", Sim.Device=PMOS, Sim.Type=VDMOS, Sim.Pins="1=D 2=G 3=S"
R1 R2 R3 R4 R5 R6 R9 R10 R12 R16 R17 R18 R21 R22 R23 R27 R28 R30 R31 R32 R33 R34 R35 R37 R38 R39 R40 R41 R42 R43 R44 R45 R46 R47 R48 R49 R49 R50 R51 R52 R53 R54 R55 R56 R57 R58 R59 R60 R61 R62 R63 R64 R65 R66 R67 R67 R68 R69 R70 R71 R72 R73 R74 R74 R75 R76 R77 R78 R79 R80 R81 R82 R83 R84 R85: library part R_0603_1608Metric, "Resistor SMD 0603 (1608 Metric), square (rectangular) end terminal, IPC-7351 nominal, (Body size source: IPC-SM-782 page 72, https://www.pcb-3d.com/wordpress/wp-content/uploads/ipc-sm-782a_amendment_1_and_2.pdf), generated with kicad-footprint-generator", ki_fp_filters=R_*
  R1 R2: Datasheet=https://fscdn.rohm.com/en/products/databook/datasheet/passive/resistor/chip_resistor/mcr-e.pdf, Field4=Farnell, Field5=9239197, Field7="KOA EUROPE GMBH", Field6=RK73G1ETQTP4700D, Field8=120887981, Part Description="Resistor 470R M1005 1% 63mW"
  R3 R4 R43 R44 R45 R46: Datasheet=https://fscdn.rohm.com/en/products/databook/datasheet/passive/resistor/chip_resistor/mcr-e.pdf, Field4=Farnell, Field5=9239235, Field7="KOA EUROPE GMBH", Field6=RK73H1ETTP1001F, Part Description="Resistor 1K M1005 1% 63mW", Field8=125049511
  R5 R6 R9 R10 R16 R17 R18 R21 R22 R23 R27 R28 R30 R47 R48 R49 R49 R50 R51 R52 R53 R54 R55 R56 R57 R58 R59 R60 R61 R62 R63 R64 R65 R66 R67 R67 R68 R69 R70 R71 R72 R73 R74 R74 R75 R76 R77 R78 R79 R80 R81 R82 R84 R85: Description="Resistor, small symbol"
  R83: Description=Resistor
R7 R8: library part R_0805_2012Metric_Pad1.20x1.40mm_HandSolder, "Resistor SMD 0805 (2012 Metric), square (rectangular) end terminal, IPC-7351 nominal with elongated pad for handsoldering. (Body size source: IPC-SM-782 page 72, https://www.pcb-3d.com/wordpress/wp-content/uploads/ipc-sm-782a_amendment_1_and_2.pdf), generated with kicad-footprint-generator", Datasheet=https://fscdn.rohm.com/en/products/databook/datasheet/passive/resistor/chip_resistor/mcr-e.pdf, ki_fp_filters=R_*
  R7: Field4=Farnell, Field5=9233750, Field7=Rohm, Field6=MCR10EZPJ000, Part Description="Resistor 0R M2012 5%", Field8=121629591
  R8: Field4=nf, Field5=nf, Field6=nf
R11 R13 R14 R15 R19 R20 R24 R25 R26 R36: library part R_0402_1005Metric, "Resistor SMD 0402 (1005 Metric), square (rectangular) end terminal, IPC-7351 nominal, (Body size source: IPC-SM-782 page 72, https://www.pcb-3d.com/wordpress/wp-content/uploads/ipc-sm-782a_amendment_1_and_2.pdf), generated with kicad-footprint-generator", ki_fp_filters=R_*
  R11 R13 R14 R15 R19 R20 R24 R25 R26: Description="Resistor, small symbol"
  R36: Description=Resistor
REF**: library part OSHW-Symbol_6.7x6mm_SilkScreen, "Open Source Hardware Symbol"
U1: library part TSOT-23_HandSoldering, "5-pin TSOT23 package, http://cds.linear.com/docs/en/packaging/SOT_5_05-08-1635.pdf", Datasheet=https://www.richtek.com/assets/product_file/RT9742/DS9742-10.pdf, Field4=Farnell, Field5=2575555, Field6=RT9742SNGV, Field7=RichTek, Part Description="Power Switch/Driver 1:1 N-Channel 500mA SOT-23-3", Field8=USWI00155
U2 U3: library part USON-10_2.5x1.0mm_P0.5mm, "USON-10 2.5x1.0mm_ Pitch 0.5mm http://www.ti.com/lit/ds/symlink/tpd4e02b04.pdf", Datasheet=http://www.ti.com/lit/ds/symlink/tpd2eusb30a.pdf, Field4=Farnell, Field5=2335455, Field6=CDDFN10-3324P-13, Field7=Bourns, Field8=UDIO00346, Part Description="Quad TVS diode for high speed signals (USB3, GigE etc.)", ki_fp_filters=USON*2.5x1.0mm*P0.5mm*
U4: library part SOT-353_SC-70-5, "SOT-353, SC-70-5", Datasheet=https://www.diodes.com/assets/Datasheets/74LVC1G07.pdf, Field4=Farnell, Field5=2425492, Field6=74LVC1G07SE-7, Field7=Diodes, Part Description="Buffer, Non-Inverting 1 Element 1 Bit per Element Open Drain Output SOT-353", ki_fp_filters="SOT* SG-*"
U5: library part SOT-23-5, "SOT, 5 Pin (JEDEC MO-178 Var AA https://www.jedec.org/document_search?search_api_views_fulltext=MO-178), generated with kicad-footprint-generator ipc_gullwing_generator.py", Datasheet=https://www.richtek.com/assets/product_file/RT9742/DS9742-00.pdf, Field4=Farnell, Field5=2545875, Field6=RT9742GGJ5, Field7=RichTek, Field8=USWI00166, Part Description="Power Switch/Driver 1:1 N-Channel 1A TSOT-23-5"
U6: library part SOT-223-3_TabPin2, "module CMS SOT223 4 pins", Datasheet=http://www.advanced-monolithic.com/pdf/ds1117.pdf, Description="1A Low Dropout regulator, positive, 3.3V fixed output, SOT-223", ki_fp_filters=SOT?223*TabPin2*
U7: library part Crystal_SMD_3225-4Pin_3.2x2.5mm, "SMD3225/4, Crystal, 3.2x2.5mm package, SMD, generated with kicad-footprint-generator make_crystal.py, http://www.txccrystal.com/images/pdf/7m-accuracy.pdf", Datasheet=https://abracon.com/Oscillators/ASEK.pdf, Field5=ASEK-32.768KHZ-L-R-T, Field6=ASEK-32.768KHZ-L-R-T, Field7=abracon, Part Description="32KHz Xtal oscilator"
U8: library part QFN-64-1EP_9x9mm_P0.5mm_EP5.2x5.2mm_ThermalVias, "QFN, 64 Pin (https://www.silabs.com/documents/public/data-sheets/Si5345-44-42-D-DataSheet.pdf#page=51), generated with kicad-footprint-generator ipc_noLead_generator.py"
U9 U11: library part SOIC-8_3.9x4.9mm_P1.27mm, "SOIC, 8 Pin (JEDEC MS-012AA, https://www.analog.com/media/en/package-pcb-resources/package/pkg_pdf/soic_narrow-r/r_8.pdf), generated with kicad-footprint-generator ipc_gullwing_generator.py", Datasheet=https://www.winbond.com/resource-files/W25X40CL_G%2020210505.pdf, Description="4Mbit / 512KiB Serial Flash memory, Standard/Dual I/O SPI, 2.3-3.6V, SOIC-8 (150 mil)", ki_fp_filters=SOIC*3.9x4.9mm*P1.27mm*
U10 U12: library part QFN-64-1EP_8x8mm_P0.4mm_EP6.5x6.5mm_ThermalVias, "QFN, 64 Pin (http://ww1.microchip.com/downloads/en/DeviceDoc/64L_VQFN_8x8_with%206_5x6_5%20EP_JXX_C04-0437A.pdf), generated with kicad-footprint-generator ipc_noLead_generator.py", Description="JMS561 is a SuperSpeed USB 5Gb/s to dual SATA 6Gb/s bridge controller, which also supports various application configurations."
Y1 Y2 Y3: library part ABM810000MHZ12D2W, "ABM8", Description="Four pin crystal, GND on pins 2 and 4", ki_fp_filters=Crystal*

## Nets (pads, with @x,y where several pads share a name; then routed paths per layer and width w, separated by ;. In a path a pad name is that pad's centre, name@x,y a point inside that pad or via, vN(x,y) a via of type N, cw(c..) or ccw(c..) an arc to the next point about the centre after c; other vN are vias at no path point)
+1V2: C58.1 C59.1 C60.1 C61.1 C62.1 C63.1 C69.1 C70.1 C71.1 C72.1 C73.1 C74.1 U8.9 U8.15 U8.17 U8.20 U8.26 U8.29 U8.37 U8.43 U8.48 U8.50 U8.61 U8.64
+1V2A: C31.1 C32.1 L1.2 R15.1 TP4.1
+1V8: R8.1
"+3V3 M.2": C64.1 C91.1 C92.1 C93.1 C94.1 D10.2 D11.2 D12.2 D13.2 IC3.5 IC3.7 J14.2 J14.4 J14.70 J14.72 J14.74 J15.2 J15.4 J15.70 J15.72 J15.74 J16.2 J16.4 J16.70 J16.72 J16.74 J17.2 J17.4 J17.70 J17.72 J17.74 L5.2 R36.2 U7.1 U7.4
+3V3A: C82.1 C83.1 C84.1 C85.1 C86.1 C87.1 R31.1 R32.1 R33.1 R34.1 R35.1 U8.1 U8.10 U8.21 U8.32 U8.38 U8.56
+5V: Q5.3 Q8.3 Q13.3 Q16.3 R48.2 R49.1@67.965,190.608 R60.1 R66.2 R67.1@58.695,132.488 R74.1@62.705,134.998 R78.2
"+5V S2": C48.1 IC2.1 L4.2 R18.2 R23.1 TP7.1
+5V-HDD0: C96.1@93.693,200.004 C98.2@59.81,34.878 J18.14 J18.15 J18.16 Q5.1
+5V-HDD1: C106.2 J19.14 J19.15 J19.16 Q8.1
+5V-HDD2: C125.1@85.185,139.598 C127.2 J20.14 J20.15 J20.16 Q13.1
+5V-HDD3: C134.1@85.185,132.898 C136.2 J21.14 J21.15 J21.16 Q16.1
+12V: C99.1 C104.1 C128.1 C133.1 Q3.3 Q6.3 Q11.3 Q14.3 R49.2@69.615,188.098 R54.2 R67.2@60.345,129.978 R72.2
+12V-HDD0: C97.1 C98.1@94.455,194.368 J18.20 J18.21 J18.22 Q3.1
+12V-HDD1: C105.1 J19.20 J19.21 J19.22 Q6.1
+12V-HDD2: C126.1 J20.20 J20.21 J20.22 Q11.1
+12V-HDD3: C134.1@58.13,74.708 C135.1@85.185,129.548 J21.20 J21.21 J21.22 Q14.1
"/Project Architecture/CM5_GPIO/+3V3": D1.2 D2.2 J3.L1 J3.L3 J3.R1 J4.1 J6.2 Module1.84 Module1.86 R5.1 R6.1 R7.1 U4.5 U5.5
"/Project Architecture/CM5_GPIO/+5V": J11.1 Module1.77 Module1.79 Module1.81 Module1.83 Module1.85 Module1.87
"/Project Architecture/CM5_GPIO/+12V": J8.1 J9.1 J12.1
"/Project Architecture/CM5_GPIO/CAM_GPIO0": Module1.97
"/Project Architecture/CM5_GPIO/CAM_GPIO1": Module1.100
"/Project Architecture/CM5_GPIO/GPIO2": J6.4 Module1.58 R6.2
"/Project Architecture/CM5_GPIO/GPIO3": J6.3 Module1.56 R5.2
"/Project Architecture/CM5_GPIO/GPIO5": Module1.34
"/Project Architecture/CM5_GPIO/GPIO6": Module1.30
"/Project Architecture/CM5_GPIO/GPIO7": Module1.37
"/Project Architecture/CM5_GPIO/GPIO8": J4.5 Module1.39
"/Project Architecture/CM5_GPIO/GPIO9": Module1.40
"/Project Architecture/CM5_GPIO/GPIO10": J4.3 Module1.44
"/Project Architecture/CM5_GPIO/GPIO11": J4.4 Module1.38
"/Project Architecture/CM5_GPIO/GPIO16": Module1.29
"/Project Architecture/CM5_GPIO/GPIO17": Module1.50
"/Project Architecture/CM5_GPIO/SCL0": Module1.80
"/Project Architecture/CM5_GPIO/SDA0": Module1.82
"/Project Architecture/CM5_GPIO/USBOTG": J7.10
"/Project Architecture/CM5_High Speed IO/+3V3": J2.22
"/Project Architecture/CM5_High Speed IO/+5V S1": C1.1 U1.1
"/Project Architecture/CM5_High Speed IO/CAM_GPIO0": J2.17
"/Project Architecture/CM5_High Speed IO/CAM_GPIO1": J2.18
"/Project Architecture/CM5_High Speed IO/PCIE_CLK_N": Module1.112
"/Project Architecture/CM5_High Speed IO/PCIE_CLK_P": Module1.110
"/Project Architecture/CM5_High Speed IO/PCIE_nCLKREQ": Module1.102
"/Project Architecture/CM5_High Speed IO/PCIE_nRST": Module1.109
"/Project Architecture/CM5_High Speed IO/PCIE_nWAKE": Module1.104
"/Project Architecture/CM5_High Speed IO/PCIE_RX_N": Module1.118
"/Project Architecture/CM5_High Speed IO/PCIE_RX_P": Module1.116
"/Project Architecture/CM5_High Speed IO/PCIE_TX_N": Module1.124
"/Project Architecture/CM5_High Speed IO/PCIE_TX_P": Module1.122
"/Project Architecture/CM5_High Speed IO/SCL0": J2.20
"/Project Architecture/CM5_High Speed IO/SDA0": J2.21
"/Project Architecture/CM5_High Speed IO/USB2_N": Module1.103
"/Project Architecture/CM5_High Speed IO/USB2_P": Module1.105
"/Project Architecture/CM5_High Speed IO/USB3-0-RX_N": Module1.128
"/Project Architecture/CM5_High Speed IO/USB3-0-RX_P": Module1.130
"/Project Architecture/CM5_High Speed IO/USB3-0-TX_N": Module1.140
"/Project Architecture/CM5_High Speed IO/USB3-0-TX_P": Module1.142
"/Project Architecture/CM5_High Speed IO/USB3-1-RX_N": Module1.157
"/Project Architecture/CM5_High Speed IO/USB3-1-RX_P": Module1.159
"/Project Architecture/CM5_High Speed IO/USB3-1-TX_N": Module1.169
"/Project Architecture/CM5_High Speed IO/USB3-1-TX_P": Module1.171
"/Project Architecture/CM5_High Speed IO/USBOTG": Module1.101
"/Project Architecture/Input/+5V": +5V1.1 F2.1 J13.2
"/Project Architecture/Input/+5V S1": C12.1 C13.1 C14.1 C15.1 C16.1 C17.1 C18.1 C19.1 D5.2 F2.2
"/Project Architecture/Input/+12V": +12V1.1 C4.1 C5.1 C6.1 C7.1 C8.1 C9.1 C10.1 C11.1 D4.2 F1.1 F1.2 J13.3 R9.2
"/Project Architecture/M.2 Drives/+5V S1": C77.2 C78.2 C80.1 C81.1 IC3.2 IC3.13 IC3.14
"/Project Architecture/M.2 Drives/PCIE_CLK_N": U8.47
"/Project Architecture/M.2 Drives/PCIE_CLK_P": U8.46
"/Project Architecture/M.2 Drives/PCIE_nCLKREQ": J14.52 J15.52 J16.52 J17.52
"/Project Architecture/M.2 Drives/PCIE_nRST": U8.3
"/Project Architecture/M.2 Drives/PCIE_nWAKE": J14.54 J15.54 J16.54 J17.54
"/Project Architecture/M.2 Drives/PCIE_RX_N": U8.52
"/Project Architecture/M.2 Drives/PCIE_RX_P": U8.51
"/Project Architecture/M.2 Drives/PCIE_TX_N": C89.1
"/Project Architecture/M.2 Drives/PCIE_TX_P": C88.1
"/Project Architecture/Power/+1V2": C37.1 C39.1 L3.2 R12.1 R20.1 TP6.1
"/Project Architecture/Power/+3V3": C25.1 R16.2 TP3.1 U6.2
"/Project Architecture/Power/+3V3A": C34.1 C38.1 L2.2 R17.2 R19.1 TP5.1
"/Project Architecture/Power/+5V S1": C20.2 C21.2 C24.1 C27.2 C28.1 IC1.11 IC1.13 IC1.18 IC1.20 IC1.32 IC1.33 IC1.34 IC1.38 IC1.40 U6.3
"/Project Architecture/Sata Drives 1/1V2A": C119.1@90.4,188.858 C120.1@64.3,180.568 C121.1 C122.1 C123.1@68.31,195.628 U10.29 U10.37 U10.40 U10.46
"/Project Architecture/Sata Drives 1/1V2D": C116.1 C117.1 C118.1 U10.4 U10.12 U10.17 U10.20 U10.32 U10.51 U10.57
"/Project Architecture/Sata Drives 1/3V3": C109.1 C110.1 JP1.1 JP2.1 R59.1 U9.3 U9.7 U9.8 U10.10 U10.52
"/Project Architecture/Sata Drives 1/3V3A": C111.1 C112.1 U10.26
"/Project Architecture/Sata Drives 1/GPIO0": U10.3
"/Project Architecture/Sata Drives 1/GPIO1": R59.2 U10.1
"/Project Architecture/Sata Drives 1/GPIO2": U9.1 U10.18
"/Project Architecture/Sata Drives 1/GPIO3": U10.19
"/Project Architecture/Sata Drives 1/GPIO4": U10.7
"/Project Architecture/Sata Drives 1/GPIO5": JP1.2 U10.6
"/Project Architecture/Sata Drives 1/GPIO6": U10.2
"/Project Architecture/Sata Drives 1/GPIO7": JP2.2 U10.5
"/Project Architecture/Sata Drives 1/GPIO8": R56.2 R58.1 U10.8
"/Project Architecture/Sata Drives 1/GPIO9": R51.2 R53.1 U10.50
"/Project Architecture/Sata Drives 1/GPIO10": R62.1 U10.53